# EAGLE board flatsat_v2 (EAGLE 9.5.2)
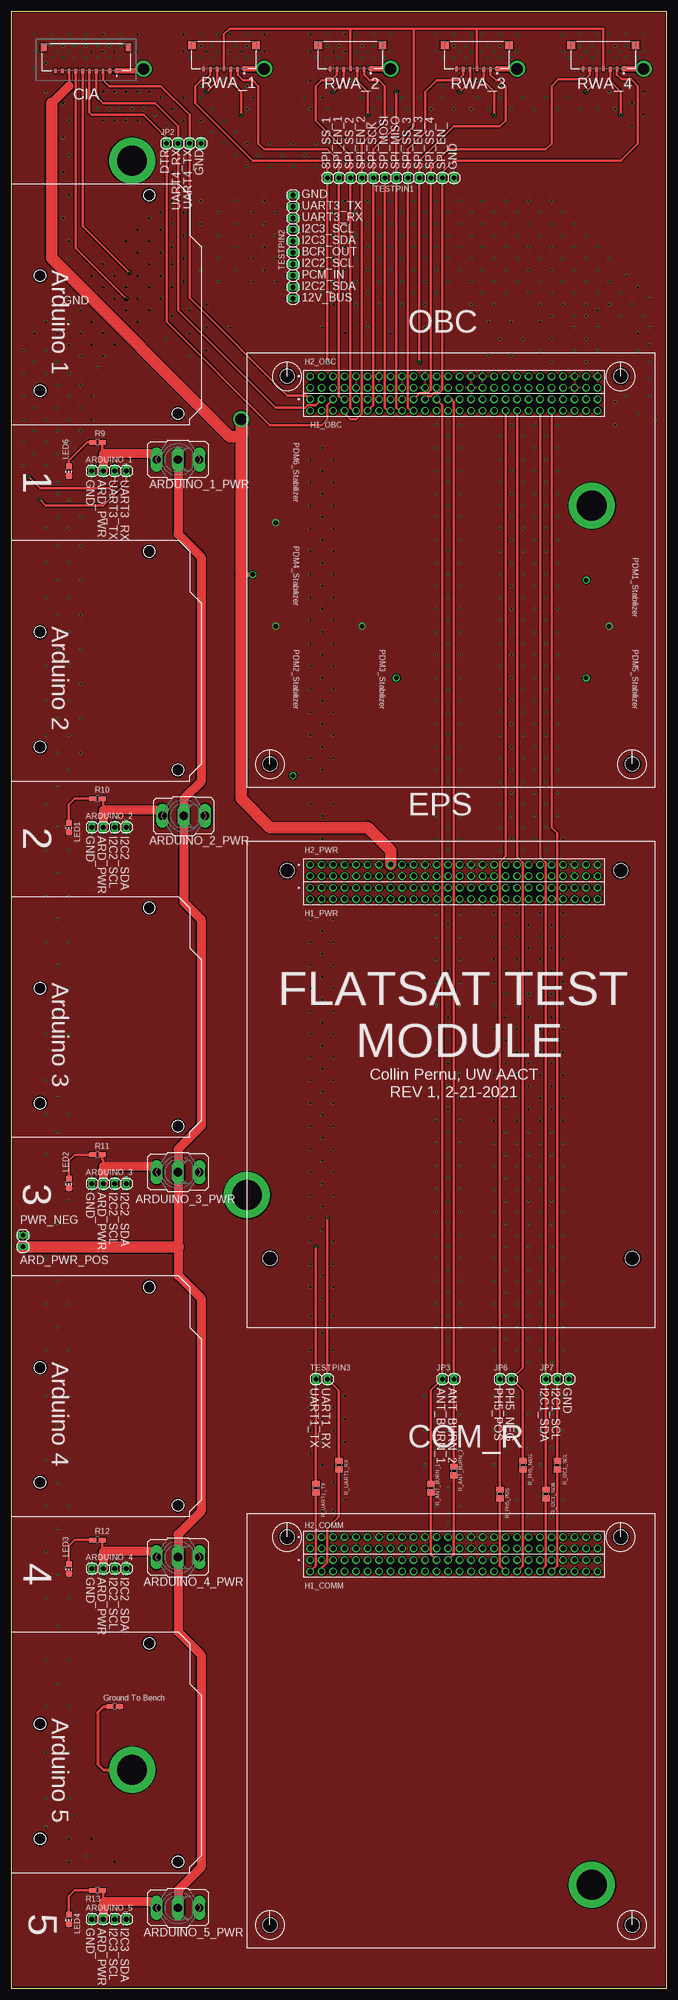
[diagram p0: board, top side]
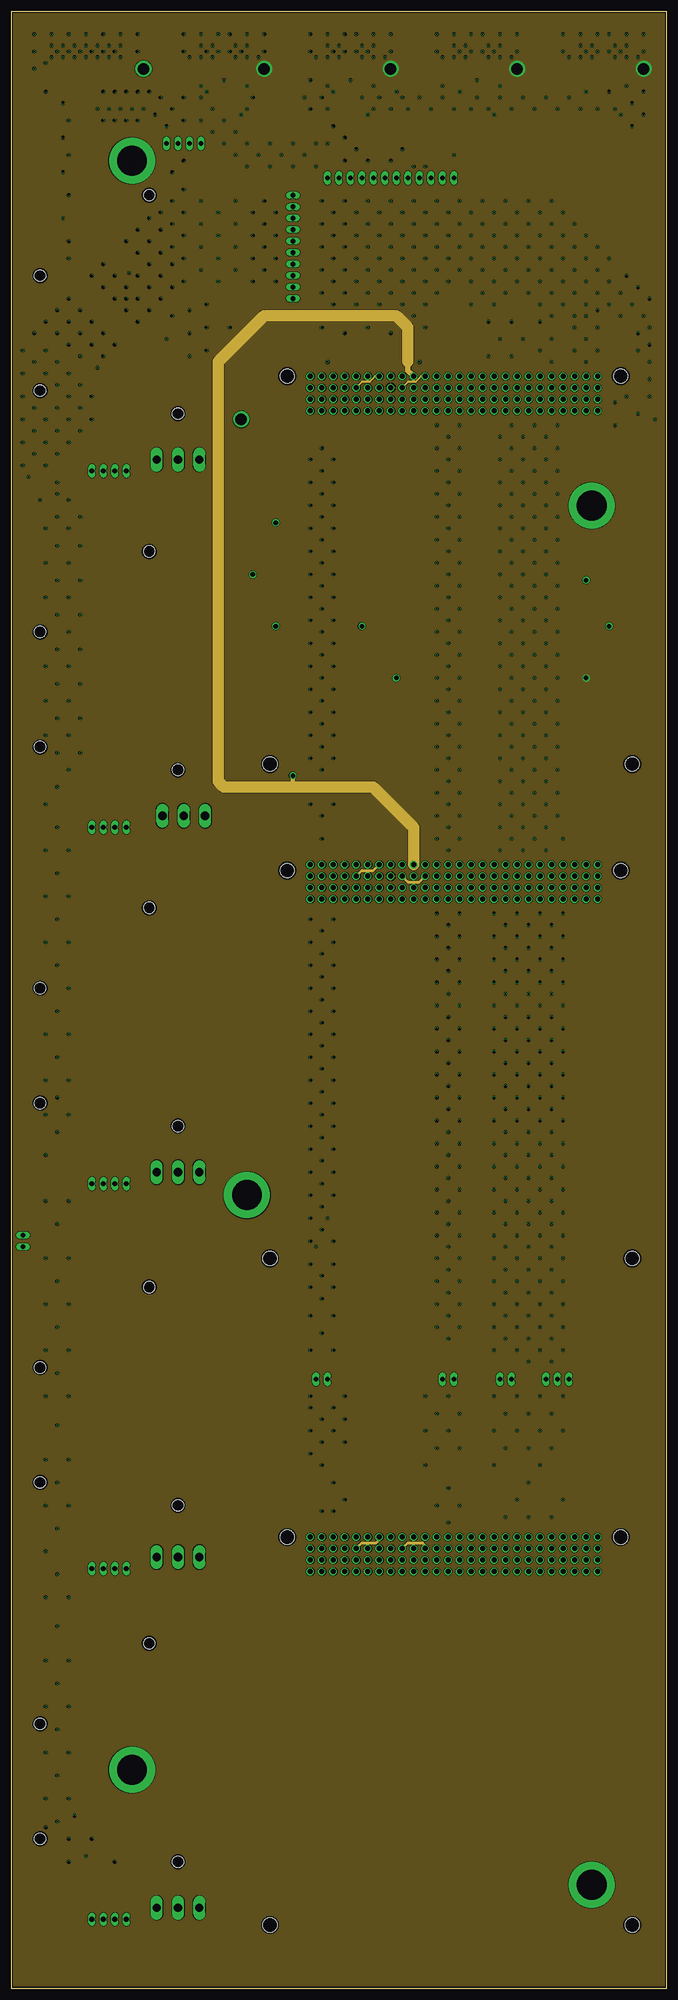
[diagram p1: board, inner layer Route2]
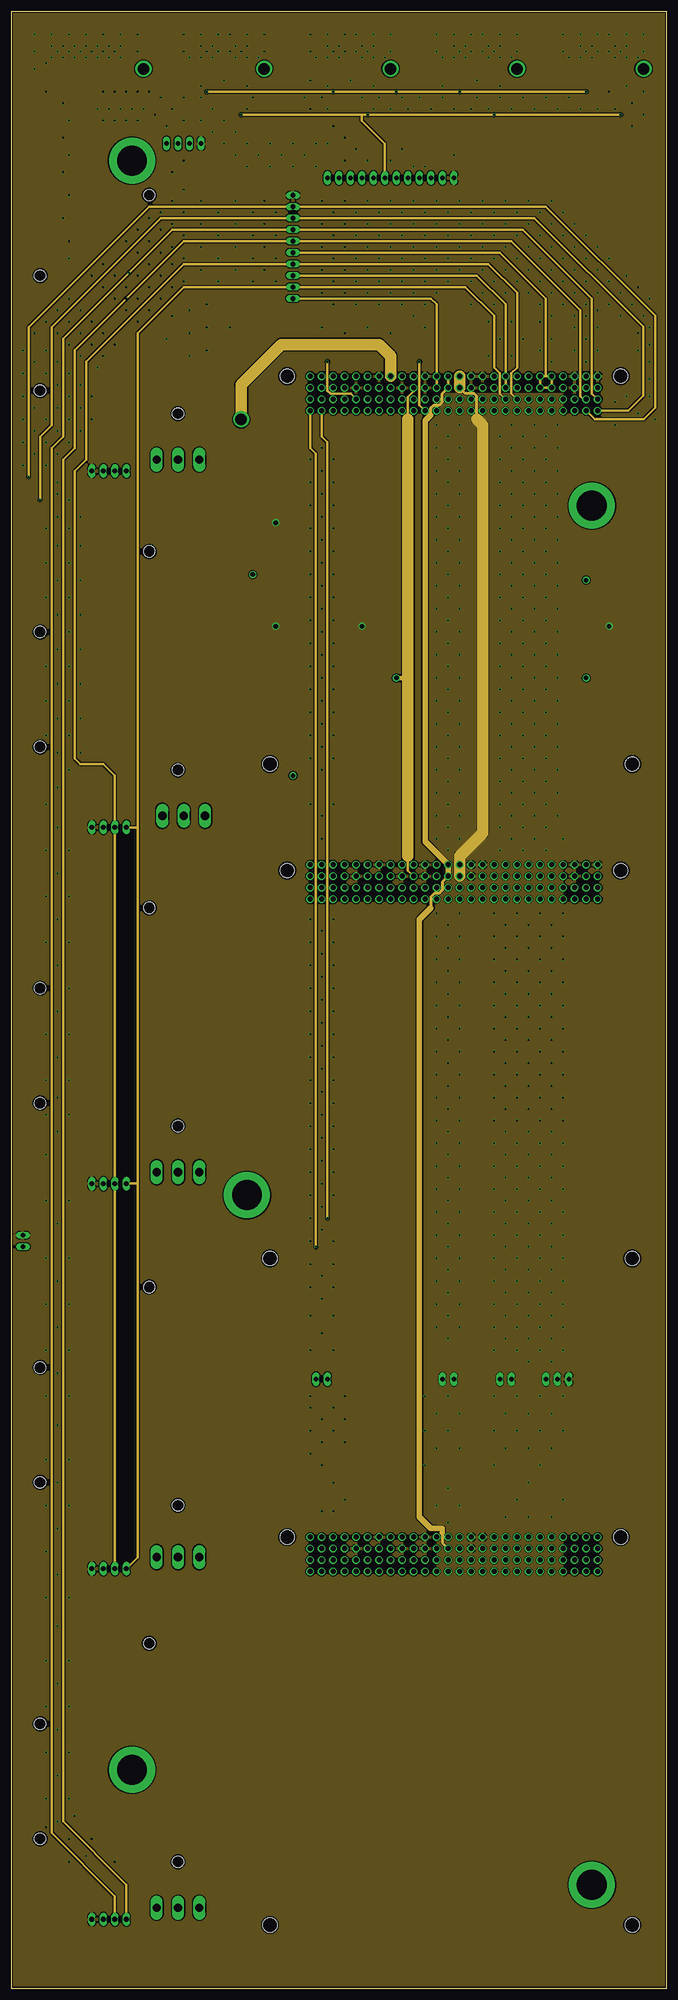
[diagram p2: board, inner layer Route15]
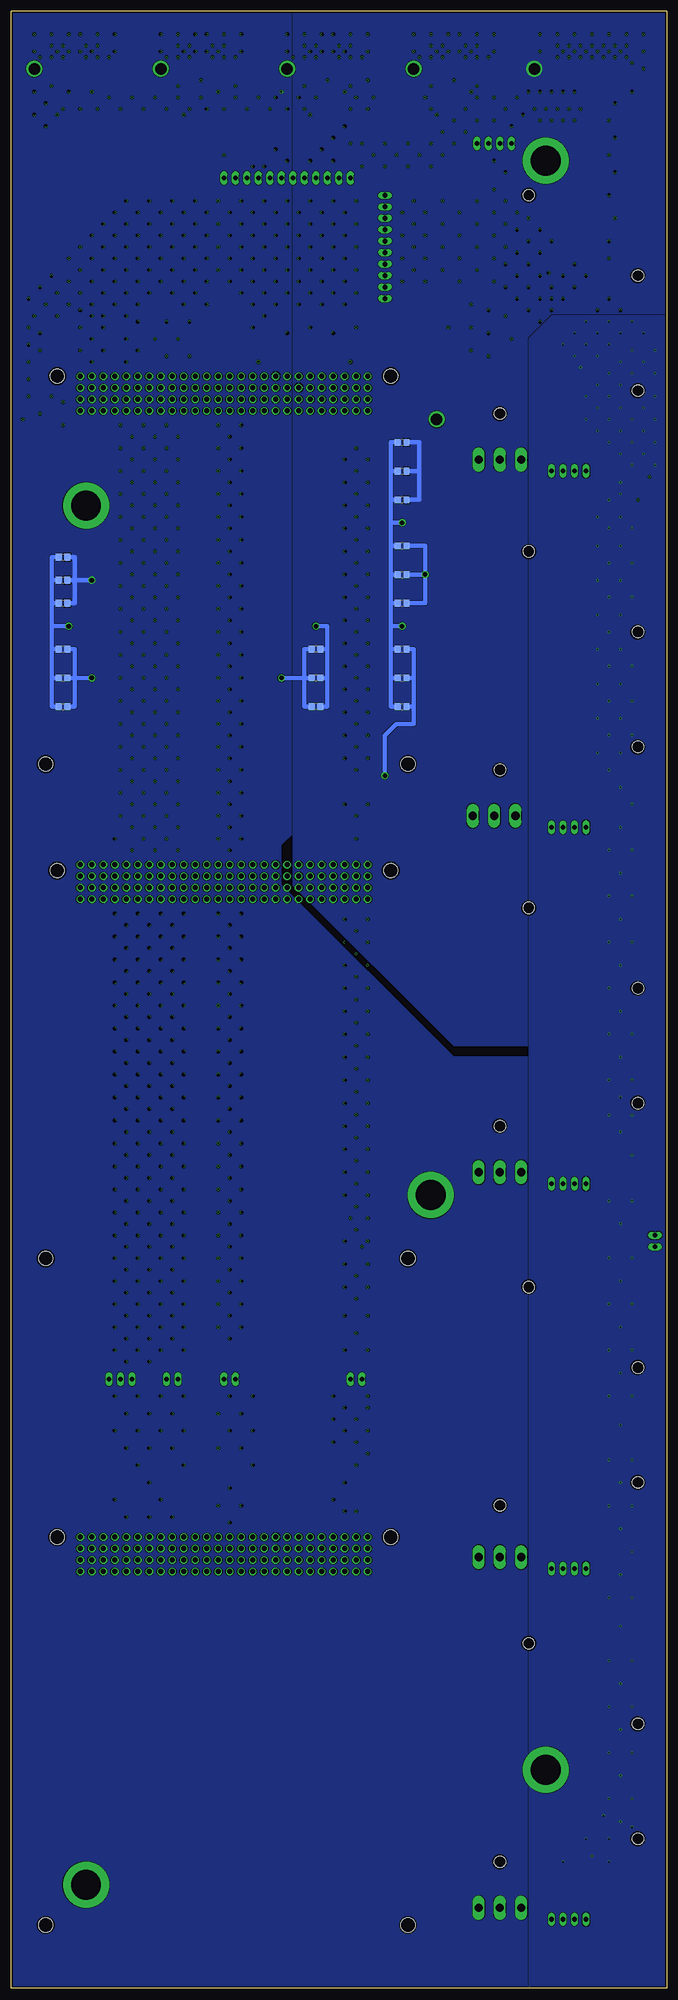
[diagram p3: board, bottom side, seen from below]

Size 144.78 x 436.88 mm. Coordinates in mm from the lower left corner, seen from the top.
Outline: 0,0 144.78,0 144.78,436.88 0,436.88 0,0
Copper layers (1*2*15*16): Top 0.035559375mm / dielectric 0.17018125mm / Route2 0.01778125mm / dielectric 47mil / Route15 0.01778125mm / dielectric 0.17018125mm / Bottom 0.035559375mm
Design rules "oshpark-4layer": minimum track width 5mil, minimum drill 10mil, track to track 5mil, track to pad 5mil, pad to pad 5mil, via to via 5mil, smd to smd 5mil, copper to edge 15mil, drill to drill 6mil, minimum pad ring 4mil, minimum via ring 4mil, stop-mask expansion 1.5mil, vias tented up to drill 0mil, thermal gap 10mil
Net classes: 0 default: width 0.305 mm; 1 Power Line: width 0.356 mm; 2 Signal Line: width 0.254 mm
Holes 3.17 mm at 134.62,356.24 60.96,356.24 137.16,270.51 57.15,270.51 60.96,99.69 134.62,99.69 137.16,13.97 57.15,13.97 60.96,247.01 134.62,247.01 137.16,161.29 57.15,161.29
Holes 2.54 mm at 30.48,238.76 36.83,269.24 6.35,274.32 30.48,317.5 36.83,347.98 6.35,353.06 30.48,396.24 6.35,195.58 36.83,190.5 30.48,154.94 6.35,111.76 36.83,106.68 30.48,76.2 36.83,27.94 6.35,33.02 6.35,58.42 6.35,137.16 6.35,220.98 6.35,299.72 6.35,378.46

## Footprints (pad centres in the part's own frame; a part is rotated, then mirrored left to right if it is on the bottom)
1X02 = drill 1.016 long: 1 -1.27,0; 2 1.27,0
1X04 = drill 1.016 long: 1 -3.81,0; 2 -1.27,0; 3 1.27,0; 4 3.81,0
M9040P = drill 1.803 long: 1 0,4.699; 2 0,0; 3 0,-4.699
C0805 = smd 1.3 x 1.5: 1 -0.95,0; 2 0.95,0
5040501091 = smd 0.6 x 1: 1 6.75,-2.975; 2 5.25,-2.975; 3 3.75,-2.975; 4 2.25,-2.975; 5 0.75,-2.975; 6 -0.75,-2.975; 7 -2.25,-2.975; 8 -3.75,-2.975; 9 -5.25,-2.975; 10 -6.75,-2.975 | smd 1.25 x 1.8: MP1 -9.355,2.215; MP2 9.355,2.215
ESQ-126-39-G-D_SAMTEC_ESQ-126-39-G-D = drill 1.1: 1 0,0; 2 0,-2.54; 3 2.54,0; 4 2.54,-2.54; 5 5.08,0; 6 5.08,-2.54; 7 7.62,0; 8 7.62,-2.54; 9 10.16,0; 10 10.16,-2.54; 11 12.7,0; 12 12.7,-2.54; 13 15.24,0; 14 15.24,-2.54; 15 17.78,0; 16 17.78,-2.54; 17 20.32,0; 18 20.32,-2.54; 19 22.86,0; 20 22.86,-2.54; 21 25.4,0; 22 25.4,-2.54; 23 27.94,0; 24 27.94,-2.54; 25 30.48,0; 26 30.48,-2.54; 27 33.02,0; 28 33.02,-2.54; 29 35.56,0; 30 35.56,-2.54; 31 38.1,0; 32 38.1,-2.54; 33 40.64,0; 34 40.64,-2.54; 35 43.18,0; 36 43.18,-2.54; 37 45.72,0; 38 45.72,-2.54; 39 48.26,0; 40 48.26,-2.54; 41 50.8,0; 42 50.8,-2.54; 43 53.34,0; 44 53.34,-2.54; 45 55.88,0; 46 55.88,-2.54; 47 58.42,0; 48 58.42,-2.54; 49 60.96,0; 50 60.96,-2.54; 51 63.5,0; 52 63.5,-2.54
1X03 = drill 1.016 long: 1 -2.54,0; 2 0,0; 3 2.54,0
CHIP-LED0805 = smd 1.2 x 1.2: A 0,-1.05; C 0,1.05
R0805W = smd 1.5 x 1: 1 -1.052,0; 2 1.052,0
M0805 = smd 1.3 x 1.6: 1 -0.95,0; 2 0.95,0
504050-0791 = smd 0.6 x 1: 1 4.5,0; 2 3,0; 3 1.5,0; 4 0,0; 5 -1.5,0; 6 -3,0; 7 -4.5,0 | smd 1.68 x 1.8: 8 -7.105,5.19; 9 7.105,5.19
BENCH_MOUNING_HOLE = drill 6.604 pad 10.16: P$1 0,0
1X12 = drill 1.016 long: 1 -13.97,0; 2 -11.43,0; 3 -8.89,0; 4 -6.35,0; 5 -3.81,0; 6 -1.27,0; 7 1.27,0; 8 3.81,0; 9 6.35,0; 10 8.89,0; 11 11.43,0; 12 13.97,0
1X10 = drill 1.016 long: 1 -11.43,0; 2 -8.89,0; 3 -6.35,0; 4 -3.81,0; 5 -1.27,0; 6 1.27,0; 7 3.81,0; 8 6.35,0; 9 8.89,0; 10 11.43,0

## Placement (x,y rotation side)
ADDUINO_PWR  [1X02]  2.54,165.1 90 top
ARDUINO_1  [1X04]  21.59,335.28 0 top
ARDUINO_1_PWR  [M9040P]  36.83,337.82 90 top
ARDUINO_2  [1X04]  21.59,256.54 0 top
ARDUINO_2_PWR  [M9040P]  38.1,259.08 90 top
ARDUINO_3  [1X04]  21.59,177.8 0 top
ARDUINO_3_PWR  [M9040P]  36.83,180.34 90 top
ARDUINO_4  [1X04]  21.59,92.71 0 top
ARDUINO_4_PWR  [M9040P]  36.83,95.25 90 top
ARDUINO_5  [1X04]  21.59,15.24 0 top
ARDUINO_5_PWR  [M9040P]  36.83,17.78 90 top
C1  47uF  [C0805]  133.35,316.23 0 bottom
C2  1uF  [C0805]  133.35,311.15 0 bottom
C3  0.1uF  [C0805]  133.35,306.07 0 bottom
C4  47uF  [C0805]  58.42,289.56 0 bottom
C5  1uF  [C0805]  58.42,283.21 0 bottom
C6  0.1uF  [C0805]  58.42,295.91 0 bottom
C7  47uF  [C0805]  77.47,289.56 180 bottom
C8  1uF  [C0805]  77.47,283.21 180 bottom
C9  0.1uF  [C0805]  77.47,295.91 180 bottom
C10  47uF  [C0805]  58.42,312.42 0 bottom
C11  1uF  [C0805]  58.42,306.07 0 bottom
C12  0.1uF  [C0805]  58.42,318.77 0 bottom
C13  47uF  [C0805]  133.35,289.56 0 bottom
C14  1uF  [C0805]  133.35,283.21 0 bottom
C15  0.1uF  [C0805]  133.35,295.91 0 bottom
C16  47uF  [C0805]  58.42,335.28 0 bottom
C17  1uF  [C0805]  58.42,328.93 0 bottom
C18  0.1uF  [C0805]  58.42,341.63 0 bottom
CIA  5040501091  [5040501091]  16.51,426.72 0 top
H1_COMM  ESQ-126-39-G-D_ESQ-126-39-G-D  [ESQ-126-39-G-D_SAMTEC_ESQ-126-39-G-D]  66.04,94.61 0 top
H1_OBC  ESQ-126-39-G-D_ESQ-126-39-G-D  [ESQ-126-39-G-D_SAMTEC_ESQ-126-39-G-D]  66.04,351.15 0 top
H1_PWR  ESQ-126-39-G-D_ESQ-126-39-G-D  [ESQ-126-39-G-D_SAMTEC_ESQ-126-39-G-D]  66.04,243.21 0 top
H2_COMM  ESQ-126-39-G-D_ESQ-126-39-G-D  [ESQ-126-39-G-D_SAMTEC_ESQ-126-39-G-D]  66.04,99.69 0 top
H2_OBC  ESQ-126-39-G-D_ESQ-126-39-G-D  [ESQ-126-39-G-D_SAMTEC_ESQ-126-39-G-D]  66.04,356.24 0 top
H2_PWR  ESQ-126-39-G-D_ESQ-126-39-G-D  [ESQ-126-39-G-D_SAMTEC_ESQ-126-39-G-D]  66.04,248.28 0 top
JP2  [1X04]  38.1,407.67 0 top
JP3  [1X02]  96.52,134.62 0 top
JP6  [1X02]  109.22,134.62 0 top
JP7  [1X03]  120.65,134.62 0 top
LED1  [CHIP-LED0805]  12.7,256.54 180 top
LED2  [CHIP-LED0805]  12.7,177.8 180 top
LED3  [CHIP-LED0805]  12.7,92.71 180 top
LED4  [CHIP-LED0805]  12.7,15.24 180 top
LED6  [CHIP-LED0805]  12.7,335.28 180 top
R9  0  [R0805W]  19.05,341.63 180 top
R10  0  [R0805W]  19.05,262.89 180 top
R11  0  [R0805W]  19.05,184.15 180 top
R12  0  [R0805W]  19.05,99.06 180 top
R13  0  [R0805W]  19.05,21.59 180 top
R14  0 ohm  [R0805W]  22.86,62.23 180 top
R_ANT_BURN_1  0 ohm  [M0805]  92.71,110.49 90 top
R_ANT_BURN_2  0 ohm  [M0805]  97.79,114.3 90 top
R_I2C1_SCL  0 ohm  [M0805]  120.65,115.57 270 top
R_I2C1_SDA  0 ohm  [M0805]  118.11,109.22 270 top
R_PH5_NEG  0 ohm  [M0805]  113.03,115.57 270 top
R_PH5_POS  0 ohm  [M0805]  107.95,109.22 270 top
R_UART1_RX  0 ohm  [M0805]  72.39,115.57 270 top
R_UART1_TX  0 ohm  [M0805]  67.31,110.49 270 top
RWA_1  504050-0791  [504050-0791]  46.99,424.18 0 top
RWA_2  504050-0791  [504050-0791]  74.93,424.18 0 top
RWA_3  504050-0791  [504050-0791]  102.87,424.18 0 top
RWA_4  504050-0791  [504050-0791]  130.81,424.18 0 top
TESTBENCH_1  BENCH_MOUNTING_HOLE  [BENCH_MOUNING_HOLE]  26.67,48.26 0 top
TESTBENCH_2  BENCH_MOUNTING_HOLE  [BENCH_MOUNING_HOLE]  26.67,403.86 0 top
TESTBENCH_3  BENCH_MOUNTING_HOLE  [BENCH_MOUNING_HOLE]  52.07,175.26 0 top
TESTBENCH_4  BENCH_MOUNTING_HOLE  [BENCH_MOUNING_HOLE]  128.27,327.66 0 top
TESTBENCH_5  BENCH_MOUNTING_HOLE  [BENCH_MOUNING_HOLE]  128.27,22.86 0 top
TESTPIN1  [1X12]  83.82,400.05 0 top
TESTPIN2  [1X10]  62.23,384.81 90 top
TESTPIN3  [1X02]  68.58,134.62 0 top

## Library data of the parts
ADDUINO_PWR ARDUINO_1-ARDUINO_5 JP2 JP3 JP6 JP7 TESTPIN1-TESTPIN3 = pinhead
ARDUINO_1_PWR ARDUINO_2_PWR ARDUINO_3_PWR ARDUINO_4_PWR ARDUINO_5_PWR = switch
C1-C18 = rcl; SPICEPREFIX: C
CIA = 5040501091; ARROW_PART_NUMBER: 5040501091; ARROW_PRICE-STOCK: https://www.arrow.com/en/products/5040501091/molex; DESCRIPTION: 1.50mm Pitch, Pico-Lock PCB Header, Dual Row, Right-Angle, Surface Mount, Gold over Nickel Plating, Positive Lock, Circuits; HEIGHT: 2.15mm; MANUFACTURER_NAME: Molex; MANUFACTURER_PART_NUMBER: 5040501091
H1_COMM H1_OBC H1_PWR H2_COMM H2_OBC H2_PWR = EPS Flatsat Module2; DESCRIPTION: 52 Position Elevated Socket Connector Through Hole; DIGI-KEY_PART_NUMBER: SAM10462-ND; DIGI-KEY_PURCHASE_URL: https://www.digikey.com/product-detail/en/samtec-inc/ESQ-126-39-G-D/SAM10462-ND/3601055?utm_source=snapeda&utm_medium=aggregator&utm_campaign=symbol; MF: Samtec; MP: ESQ-126-39-G-D; PACKAGE: None
LED1-LED4 LED6 = led
R9-R14 R_ANT_BURN_1 R_ANT_BURN_2 R_I2C1_SCL R_I2C1_SDA R_PH5_NEG R_PH5_POS R_UART1_RX R_UART1_TX = rcl; SPICEPREFIX: R
RWA_1-RWA_4 = 504050-0791; DESCRIPTION: Molex 504050 Series, 1.5mm Pitch 7 Way 1 Row Right Angle PCB Header, SMT Termination, 3A; HEIGHT: mm; MANUFACTURER_NAME: Molex; MANUFACTURER_PART_NUMBER: 504050-0791; MOUSER_PART_NUMBER: 538-504050-0791; MOUSER_PRICE-STOCK: https://www.mouser.co.uk/ProductDetail/Molex/504050-0791/?qs=bvCPb%252BE7ys0LP7A0OZeD8A%3D%3D
TESTBENCH_1-TESTBENCH_5 = test-library

## Nets
3V3_BUS [Power Line]: H2_OBC.27 H2_OBC.28 H2_PWR.27 H2_PWR.28
3V3_PDM1 [Power Line]: C1.2 C2.2 C3.2 H2_COMM.17 H2_OBC.17 H2_PWR.17
3V3_PDM2 [Power Line]: C4.2 C5.2 C6.2 H2_OBC.19 H2_PWR.19
3V3_PDM3 [Power Line]: C7.2 C8.2 C9.2 H2_OBC.20 H2_PWR.20
5V_BUS [Power Line]: H2_COMM.26 H2_OBC.25 H2_OBC.26 H2_PWR.25 H2_PWR.26
5V_PDM4 [Power Line]: C10.2 C11.2 C12.2 CIA.8 H2_OBC.15 H2_PWR.15
5V_PDM5 [Power Line]: C13.2 C14.2 C15.2 H2_OBC.16 H2_PWR.16 RWA_1.1 RWA_2.1 RWA_3.1 RWA_4.1
5V_PDM6 [Signal Line]: C16.2 C17.2 C18.2 CIA.1 H2_OBC.14 H2_PWR.14
5V_USB [Power Line]: H2_OBC.52
12V_BUS [Power Line]: H2_OBC.23 H2_OBC.24 TESTPIN2.1
ANT_BURN_WIRE_1: H1_OBC.23 JP3.1 R_ANT_BURN_1.2
ANT_BURN_WIRE_2: H1_OBC.25 JP3.2 R_ANT_BURN_2.2
ARDUINO_1_PWR: ARDUINO_1.2 ARDUINO_1_PWR.1 R9.1
ARDUINO_2_PWR [Signal Line]: ARDUINO_2.2 ARDUINO_2_PWR.1 R10.1
ARDUINO_3_PWR [Signal Line]: ARDUINO_3.2 ARDUINO_3_PWR.1 R11.1
ARDUINO_4_PWR [Signal Line]: ARDUINO_4.2 ARDUINO_4_PWR.1 R12.1
ARDUINO_5_PWR [Signal Line]: ARDUINO_5.2 ARDUINO_5_PWR.1 R13.1
ARUINO_MAIN_PWR [Power Line]: ADDUINO_PWR.1 ARDUINO_1_PWR.2 ARDUINO_2_PWR.2 ARDUINO_3_PWR.2 ARDUINO_4_PWR.2 ARDUINO_5_PWR.2
BCR_OUT: H2_OBC.41 H2_OBC.42 H2_OBC.43 H2_OBC.44 TESTPIN2.5
CHASSIS [Power Line]: H2_OBC.49
DTR: CIA.5 H1_OBC.5 JP2.1
GND [Power Line]: ADDUINO_PWR.2 ARDUINO_1.1 ARDUINO_2.1 ARDUINO_3.1 ARDUINO_4.1 ARDUINO_5.1 C1.1 C2.1 C3.1 C4.1 C5.1 C6.1 C7.1 C8.1 C9.1 C10.1 C11.1 C12.1 C13.1 C14.1 C15.1 C16.1 C17.1 C18.1 CIA.2 H2_COMM.10 H2_COMM.13 H2_COMM.18 H2_COMM.21 H2_COMM.22 H2_COMM.29 H2_COMM.30 H2_COMM.31 H2_OBC.10 H2_OBC.13 H2_OBC.18 H2_OBC.21 H2_OBC.22 H2_OBC.29 H2_OBC.30 H2_OBC.31 H2_OBC.47 H2_OBC.48 H2_OBC.51 H2_PWR.10 H2_PWR.13 H2_PWR.18 H2_PWR.21 H2_PWR.22 H2_PWR.29 H2_PWR.30 H2_PWR.31 H2_PWR.47 H2_PWR.48 H2_PWR.51 JP2.4 JP7.3 LED1.C LED2.C LED3.C LED4.C LED6.C R14.1 RWA_1.7 RWA_2.7 RWA_3.7 RWA_4.7 TESTPIN1.12 TESTPIN2.10
I2C1_SCL [Signal Line]: H1_OBC.44 H1_PWR.44 JP7.2 R_I2C1_SCL.1
I2C1_SDA [Signal Line]: H1_OBC.42 H1_PWR.42 JP7.1 R_I2C1_SDA.1
I2C2_SCL [Signal Line]: ARDUINO_2.3 ARDUINO_3.3 ARDUINO_4.3 H1_OBC.37 TESTPIN2.4
I2C2_SDA [Signal Line]: ARDUINO_2.4 ARDUINO_3.4 ARDUINO_4.4 H1_OBC.35 TESTPIN2.2
I2C3_SCL [Signal Line]: ARDUINO_5.3 CIA.6 H1_OBC.51 TESTPIN2.7
I2C3_SDA [Signal Line]: ARDUINO_5.4 CIA.7 H1_OBC.49 TESTPIN2.6
N$1: H1_COMM.4 R_UART1_RX.2
N$2: LED4.A R13.2
N$3: H1_COMM.2 R_UART1_TX.2
N$4: H1_COMM.36 R_PH5_POS.2
N$5: H1_COMM.38 R_PH5_NEG.2
N$6: H1_COMM.23 R_ANT_BURN_1.1
N$7: H1_COMM.25 R_ANT_BURN_2.1
N$8: H1_COMM.42 R_I2C1_SDA.2
N$9: H1_COMM.44 R_I2C1_SCL.2
N$10: LED3.A R12.2
N$11: CIA.9
N$12: CIA.10
N$13: LED2.A R11.2
N$14: LED1.A R10.2
N$15: LED6.A R9.2
N$16: R14.2 TESTBENCH_1.P$1
PCM_IN: H2_OBC.35 H2_OBC.36 TESTPIN2.3
PH5_NEG: H1_OBC.38 JP6.2 R_PH5_NEG.1
PH5_POS: H1_OBC.36 JP6.1 R_PH5_POS.1
SPI_EN_1 [Signal Line]: H1_OBC.7 RWA_1.2 TESTPIN1.2
SPI_EN_2 [Signal Line]: H1_OBC.8 RWA_2.2 TESTPIN1.4
SPI_EN_3 [Signal Line]: H1_OBC.22 RWA_3.2 TESTPIN1.9
SPI_EN_4 [Signal Line]: H1_OBC.21 RWA_4.2 TESTPIN1.11
SPI_MISO: H1_OBC.18 RWA_1.4 RWA_2.4 RWA_3.4 RWA_4.4 TESTPIN1.7
SPI_MOSI [Signal Line]: H1_OBC.16 RWA_1.3 RWA_2.3 RWA_3.3 RWA_4.3 TESTPIN1.6
SPI_SCK [Signal Line]: H1_OBC.12 RWA_1.5 RWA_2.5 RWA_3.5 RWA_4.5 TESTPIN1.5
SPI_SS_1 [Signal Line]: H1_OBC.9 RWA_1.6 TESTPIN1.1
SPI_SS_2 [Signal Line]: H1_OBC.10 RWA_2.6 TESTPIN1.3
SPI_SS_3 [Signal Line]: H1_OBC.20 RWA_3.6 TESTPIN1.8
SPI_SS_4 [Signal Line]: H1_OBC.19 RWA_4.6 TESTPIN1.10
UART1_RX: H1_OBC.4 R_UART1_RX.1 TESTPIN3.2
UART1_TX: H1_OBC.2 R_UART1_TX.1 TESTPIN3.1
UART3_RX: ARDUINO_1.4 H1_OBC.52 TESTPIN2.8
UART3_TX [Signal Line]: ARDUINO_1.3 H1_OBC.50 TESTPIN2.9
UART4_RX: CIA.4 H1_OBC.3 JP2.2
UART4_TX: CIA.3 H1_OBC.1 JP2.3

## Tracks (layer width: path | path; a pad name or v marks a point on that pad's centre or on a via)
3V3_BUS
  Route15 0.635: 102.87,346.71 102.87,351.79 102.23,352.43 100.33,352.43 H2_OBC.28
  Route15 2.54: H2_PWR.28 H2_PWR.27 99.06,250.19 104.14,255.27 104.14,345.44 102.87,346.71 | H2_OBC.27 H2_OBC.28
3V3_PDM1  (via drill 1.02)
  Bottom 1.016: C1.2 130.81,316.23 130.81,311.15 | 130.81,311.15 130.81,306.07 C3.2 | C2.2 130.81,311.15 | 130.81,311.15 v127,311.15
  pour Bottom (rank 3): 85.09,243.84 85.09,252.73 82.42,255.4 82.42,439.42 147.32,439.42 147.32,-2.54 -2.54,-2.54 -2.54,205.74 46.99,205.74
3V3_PDM2  (via drill 1.02)
  Route2 1.016: 62.23,265.43 v62.23,267.97
  Route2 1.27: H2_OBC.19 87.63,357.5 87.63,359.41
  Route2 2.54: H2_PWR.19 88.9,256.54 80.01,265.43 62.23,265.43 46.99,265.43 45.72,266.7 45.72,359.41 55.88,369.57 85.09,369.57 87.63,367.03 87.63,359.41
  Bottom 1.016: v62.23,267.97 62.23,276.86 59.69,279.4 55.88,279.4 55.88,283.21 | 55.88,283.21 55.88,289.56 | 55.88,289.56 55.88,295.91 C6.2 | C4.2 55.88,289.56 | C5.2 55.88,283.21
3V3_PDM3  (via drill 1.02)
  Route15 0.508: H2_OBC.20 88.9,352.9 87.63,351.63 87.63,346.71 | H2_PWR.20 87.63,247.01 87.63,250.19
  Route15 1.016: v85.09,289.56 87.63,289.56
  Route15 2.54: 87.63,346.71 87.63,289.56 87.63,250.19
  Bottom 1.016: C9.2 80.01,295.91 80.01,289.56 | 80.01,289.56 80.01,283.21 C8.2 | 80.01,289.56 C7.2 | 80.01,289.56 v85.09,289.56
5V_BUS
  Route15 0.508: H2_OBC.25 H2_OBC.26
  Route15 0.635: 92.71,347.64 | 92.71,347.64 92.71,349.14 93.45,349.88 93.98,349.88 94.51,349.88 95.25,350.63 95.25,352.43 H2_OBC.26 | H2_PWR.26 95.25,244.47 95.25,242.68 94.51,241.94 93.45,241.94 92.71,241.19 92.71,238.76 | 95.25,100.67 95.25,98.42 H2_COMM.26
  Route15 1.27: H2_PWR.26 H2_PWR.25 91.44,253.37 91.44,346.37 92.71,347.64 | 92.71,238.76 90.17,236.22 90.17,104.14 92.71,101.6 95.25,101.6 95.25,100.67
5V_PDM4  (via drill 1.02, 2.54)
  Top 0.508: 12.76,420.43 CIA.8
  Top 1.016: 50.8,312.42 v53.34,312.42
  Top 2.032: 8.89,416.56 12.76,420.43
  Top 2.54: H2_PWR.15 83.82,251.46 78.74,256.54 57.15,256.54 50.8,262.89 50.8,312.42 50.8,342.9 | 50.8,342.9 48.26,342.9 8.89,382.27 8.89,416.56 | 50.8,342.9 v50.8,346.71
  Route15 2.54: H2_OBC.15 83.82,360.68 81.28,363.22 59.69,363.22 50.8,354.33 v50.8,346.71
  Bottom 1.016: C11.2 53.34,306.07 v53.34,312.42 | v53.34,312.42 53.34,318.77 C12.2 | v53.34,312.42 C10.2
5V_PDM5  (via drill 1.02, 2.54)
  Top 1.27: RWA_1.1 v55.88,424.18 | RWA_2.1 v83.82,424.18 | RWA_3.1 v111.76,424.18 | RWA_4.1 v139.7,424.18
  Bottom 1.016: C15.2 130.81,295.91 130.81,289.56 | 130.81,289.56 130.81,283.21 C14.2 | C13.2 130.81,289.56 | 130.81,289.56 v127,289.56
  pour Route2 (rank 2): -1.27,438.15 146.05,438.15 146.05,-1.27 -1.27,-1.27
5V_PDM6  (via drill 2.54)
  Top 0.508: 29.21,423.75 v29.21,424.18
  Top 1.27: CIA.1 29.21,423.75
  Bottom 1.016: C18.2 54.61,341.63 54.61,335.28 | 54.61,335.28 54.61,328.93 C17.2 | C16.2 54.61,335.28
  pour Bottom (rank 2): 82.55,243.84 46.99,208.28 -2.54,208.28 -2.54,439.42 82.55,439.42
12V_BUS
  Route15 0.508: H2_OBC.24 H2_OBC.23 93.98,372.11 92.71,373.38 TESTPIN2.1
ANT_BURN_WIRE_1
  Top 0.508: H1_OBC.23 95.25,349.88 JP3.1 92.71,132.08 R_ANT_BURN_1.2
ANT_BURN_WIRE_2
  Top 0.508: H1_OBC.25 97.16,351.15 97.79,350.52 JP3.2 R_ANT_BURN_2.2
ARDUINO_1_PWR
  Top 0.508: 20.32,339.09 20.1,339.31 R9.1
  Top 2.032: ARDUINO_1_PWR.1 30.86,339.09 20.32,339.09 ARDUINO_1.2
ARDUINO_2_PWR
  Top 0.508: 20.32,260.35 20.32,262.89 R10.1
  Top 2.032: ARDUINO_2_PWR.1 32.13,260.35 20.32,260.35 ARDUINO_2.2
ARDUINO_3_PWR
  Top 0.508: 20.32,181.61 20.32,182.88 20.1,183.1 R11.1
  Top 2.032: ARDUINO_3_PWR.1 30.86,181.61 20.32,181.61 ARDUINO_3.2
ARDUINO_4_PWR
  Top 0.508: 20.32,95.25 20.1,95.25 R12.1
  Top 2.032: ARDUINO_4_PWR.1 30.86,96.52 20.32,96.52 20.32,95.25 ARDUINO_4.2
ARDUINO_5_PWR
  Top 0.508: R13.1 20.32,21.37 20.32,19.05
  Top 2.032: ARDUINO_5.2 20.32,19.05 30.86,19.05 ARDUINO_5_PWR.1
ARUINO_MAIN_PWR
  Top 2.032: ARDUINO_1_PWR.2 36.83,321.31 41.91,316.23 41.91,266.7 38.1,262.89 ARDUINO_2_PWR.2 38.1,240.03 41.91,236.22 41.91,190.5 36.83,185.42 ARDUINO_3_PWR.2 36.83,163.83 36.83,157.48 41.91,152.4 41.91,105.41 36.83,100.33 ARDUINO_4_PWR.2 36.83,78.74 41.91,73.66 41.91,26.67 36.83,21.59 ARDUINO_5_PWR.2
  Top 2.54: ADDUINO_PWR.1 36.83,163.83
BCR_OUT
  Route15 0.508: 118.11,356.24 H2_OBC.43 H2_OBC.44 H2_OBC.42 H2_OBC.41 118.11,356.24 | 118.11,356.24 118.11,373.38 107.95,383.54 TESTPIN2.5
DTR
  Top 0.508: H1_OBC.5 69.85,349.88 69.85,346.71 68.58,345.44 57.15,345.44 34.29,368.3 JP2.1 34.29,408.94 29.21,414.02 17.78,414.02 17.26,414.54 CIA.5
GND  (via drill 0.35, 1.02)
  Route2 0.508: H2_OBC.18 87.69,355.03 89.4,355.03 90.61,356.24 H2_OBC.21 | H2_OBC.10 77.53,355.03 79.24,355.03 80.45,356.24 H2_OBC.13
  Route2 0.635: H2_COMM.18 87.63,98.42 90.81,98.42 91.44,97.79 H2_COMM.22 | H2_PWR.18 87.63,244.47 90.17,244.47 H2_PWR.22 | H2_PWR.10 77.47,247.01 80.01,247.01 H2_PWR.13 | H2_COMM.10 77.47,98.42 80.64,98.42 81.28,99.06 H2_COMM.13
  Bottom 1.016: C18.1 60.96,341.63 60.96,335.28 | 60.96,335.28 60.96,328.93 | 60.96,328.93 60.96,323.85 | 60.96,323.85 60.96,318.77 | 60.96,318.77 60.96,312.42 | 60.96,312.42 60.96,306.07 | 60.96,306.07 60.96,300.99 | 60.96,300.99 60.96,295.91 | 60.96,295.91 60.96,289.56 | 60.96,289.56 60.96,283.21 C5.1 | C4.1 60.96,289.56 | C11.1 60.96,306.07 | C10.1 60.96,312.42 | C12.1 60.96,318.77 | 60.96,323.85 v58.42,323.85 | 60.96,300.99 v58.42,300.99 | C8.1 74.93,283.21 74.93,289.56 | 74.93,289.56 74.93,295.91 | 74.93,295.91 C9.1 | C7.1 74.93,289.56 | 74.93,295.91 74.93,300.99 v77.47,300.99 | C1.1 135.89,316.23 135.89,311.15 | 135.89,311.15 135.89,306.07 | 135.89,306.07 135.89,300.99 | 135.89,300.99 135.89,295.91 | 135.89,295.91 135.89,289.56 | 135.89,289.56 135.89,283.21 C14.1 | 135.89,289.56 C13.1 | 135.89,295.91 C15.1 | 135.89,306.07 C3.1 | 135.89,311.15 C2.1 | C17.1 60.96,328.93 | 135.89,300.99 v132.08,300.99 | C6.1 60.96,295.91 | 60.96,335.28 C16.1
  other vias: 71.12,387.35 73.66,389.89 76.2,387.35 73.66,384.81 71.12,392.43 76.2,392.43 81.28,392.43 78.74,389.89 81.28,387.35 78.74,384.81 76.2,382.27 71.12,382.27 73.66,379.73 78.74,379.73 81.28,382.27 83.82,384.81 83.82,389.89 86.36,392.43 86.36,387.35 86.36,382.27 83.82,379.73 68.58,389.89 68.58,384.81 68.58,379.73 68.58,374.65 71.12,377.19 73.66,374.65 76.2,377.19 78.74,374.65 81.28,377.19 83.82,374.65 88.9,389.89 88.9,384.81 88.9,379.73 88.9,374.65 86.36,377.19 91.44,377.19 91.44,382.27 91.44,387.35 93.98,389.89 93.98,384.81 91.44,392.43 96.52,392.43 96.52,387.35 96.52,382.27 93.98,379.73 96.52,377.19 93.98,374.65 99.06,379.73 99.06,384.81 99.06,389.89 101.6,392.43 104.14,384.81 106.68,387.35 109.22,384.81 106.68,382.27 104.14,389.89 109.22,389.89 114.3,389.89 111.76,387.35 114.3,384.81 111.76,382.27 109.22,379.73 104.14,379.73 106.68,377.19 111.76,377.19 114.3,379.73 116.84,382.27 116.84,387.35 119.38,389.89 119.38,384.81 119.38,379.73 116.84,377.19 101.6,387.35 101.6,382.27 101.6,377.19 101.6,372.11 104.14,374.65 106.68,372.11 109.22,374.65 110.49,368.3 114.3,374.65 116.84,372.11 121.92,387.35 121.92,382.27 121.92,377.19 121.92,372.11 119.38,374.65 124.46,374.65 124.46,379.73 124.46,384.81 127,387.35 127,382.27 124.46,389.89 129.54,384.81 129.54,379.73 127,377.19 129.54,374.65 127,372.11 132.08,377.19 132.08,382.27 104.14,394.97 109.22,394.97 106.68,392.43 111.76,392.43 114.3,394.97 116.84,392.43 121.92,392.43 119.38,394.97 68.58,394.97 73.66,394.97 78.74,394.97 83.82,394.97 88.9,394.97 93.98,394.97 99.06,394.97 58.42,392.43 58.42,387.35 55.88,389.89 53.34,387.35 53.34,392.43 49.53,389.89 45.72,392.43 45.72,387.35 45.72,382.27 49.53,384.81 53.34,382.27 55.88,384.81 58.42,382.27 55.88,379.73 53.34,377.19 58.42,377.19 49.53,379.73 45.72,377.19 41.91,389.89 41.91,384.81 41.91,379.73 41.91,394.97 49.53,394.97 55.88,394.97 38.1,382.27 35.56,384.81 38.1,387.35 35.56,389.89 38.1,392.43 38.1,377.19 35.56,394.97 38.1,397.51 35.56,401.32 38.1,403.86 19.05,415.29 20.32,419.1 21.59,415.29 22.86,419.1 24.13,415.29 25.4,419.1 26.67,415.29 27.94,419.1 29.21,415.29 30.48,419.1 33.02,417.83 35.56,415.29 38.1,412.75 7.62,419.1 11.43,416.56 12.7,412.75 11.43,408.94 12.7,405.13 27.94,431.8 24.13,431.8 22.86,427.99 27.94,427.99 20.32,431.8 20.32,427.99 16.51,431.8 12.7,427.99 12.7,431.8 8.89,431.8 5.08,431.8 5.08,427.99 5.08,424.18 21.59,426.72 19.05,426.72 19.05,429.26 21.59,429.26 16.51,426.72 16.51,429.26 17.78,427.99 13.97,429.26 13.97,426.72 15.24,427.99 11.43,429.26 11.43,426.72 10.16,427.99 8.89,429.26 8.89,426.72 7.62,425.45 24.13,426.72 24.13,429.26 43.18,427.99 41.91,426.72 41.91,429.26 50.8,427.99 48.26,427.99 49.53,426.72 49.53,429.26 44.45,426.72 44.45,429.26 45.72,427.99 52.07,426.72 52.07,429.26 39.37,426.72 38.1,427.99 38.1,431.8 41.91,431.8 45.72,431.8 55.88,431.8 52.07,431.8 48.26,431.8 54.61,426.72 55.88,427.99 71.12,427.99 69.85,426.72 69.85,429.26 78.74,427.99 76.2,427.99 77.47,426.72 77.47,429.26 72.39,426.72 72.39,429.26 73.66,427.99 80.01,426.72 80.01,429.26 67.31,426.72 66.04,427.99 66.04,431.8 69.85,431.8 73.66,431.8 83.82,431.8 80.01,431.8 76.2,431.8 82.55,426.72 83.82,427.99 99.06,427.99 97.79,426.72 97.79,429.26 106.68,427.99 104.14,427.99 105.41,426.72 105.41,429.26 100.33,426.72 100.33,429.26 101.6,427.99 107.95,426.72 107.95,429.26 95.25,426.72 93.98,427.99 93.98,431.8 97.79,431.8 101.6,431.8 111.76,431.8 107.95,431.8 104.14,431.8 110.49,426.72 111.76,427.99 127,427.99 125.73,426.72 125.73,429.26 134.62,427.99 132.08,427.99 133.35,426.72 133.35,429.26 128.27,426.72 128.27,429.26 129.54,427.99 135.89,426.72 135.89,429.26 123.19,426.72 121.92,427.99 121.92,431.8 125.73,431.8 129.54,431.8 139.7,431.8 135.89,431.8 132.08,431.8 138.43,426.72 139.7,427.99 52.07,420.37 46.99,421.64 53.34,417.83 52.07,415.29 74.93,421.64 41.91,420.37 41.91,417.83 44.45,415.29 46.99,412.75 49.53,410.21 52.07,407.67 38.1,417.83 41.91,412.75 80.01,420.37 81.28,417.83 80.01,415.29 69.85,420.37 68.58,417.83 69.85,415.29 71.12,411.48 73.66,408.94 76.2,406.4 54.61,405.13 59.69,405.13 57.15,407.67 62.23,407.67 67.31,407.67 64.77,405.13 62.23,402.59 57.15,402.59 52.07,402.59 49.53,405.13 46.99,407.67 44.45,410.21 67.31,402.59 69.85,407.67 64.77,417.83 66.04,415.29 66.04,421.64 77.47,417.83 83.82,415.29 86.36,417.83 87.63,415.29 90.17,417.83 92.71,415.29 95.25,420.37 102.87,421.64 107.95,420.37 95.25,417.83 97.79,415.29 101.6,415.29 102.87,417.83 105.41,415.29 107.95,417.83 110.49,415.29 113.03,417.83 115.57,415.29 118.11,417.83 120.65,415.29 123.19,417.83 125.73,415.29 129.54,415.29 133.35,415.29 132.08,419.1 135.89,420.37 137.16,416.56 137.16,411.48 139.7,414.02 139.7,419.1 20.32,412.75 22.86,412.75 25.4,412.75 27.94,412.75 31.75,414.02 34.29,411.48 11.43,401.32 12.7,396.24 11.43,391.16 12.7,386.08 12.7,382.27 20.32,375.92 22.86,373.38 25.4,370.84 27.94,368.3 22.86,378.46 25.4,375.92 27.94,373.38 30.48,370.84 30.48,375.92 35.56,375.92 35.56,381 33.02,378.46 33.02,373.38 27.94,378.46 27.94,383.54 27.94,388.62 25.4,386.08 20.32,381 17.78,378.46 30.48,381 30.48,386.08 30.48,391.16 33.02,383.54 33.02,388.62 33.02,392.43 20.32,365.76 17.78,368.3 15.24,370.84 12.7,373.38 10.16,370.84 7.62,368.3 5.08,365.76 7.62,361.95 5.08,359.41 7.62,356.87 10.16,365.76 12.7,363.22 15.24,360.68 17.78,363.22 15.24,365.76 12.7,368.3 10.16,359.41 12.7,356.87 15.24,354.33 10.16,354.33 2.54,361.95 2.54,356.87 12.7,351.79 15.24,349.25 10.16,349.25 73.66,403.86 78.74,403.86 83.82,403.86 86.36,406.4 88.9,402.59 91.44,402.59 97.79,405.13 12.7,346.71 10.16,344.17 15.24,344.17 12.7,341.63 7.62,341.63 7.62,336.55 10.16,339.09 7.62,346.71 5.08,349.25 2.54,351.79 2.54,346.71 5.08,344.17 2.54,341.63 5.08,339.09 2.54,336.55 10.16,330.2 12.7,328.93 10.16,332.74 10.16,325.12 12.7,322.58 10.16,318.77 12.7,314.96 10.16,311.15 12.7,307.34 10.16,303.53 12.7,299.72 10.16,295.91 12.7,292.1 10.16,288.29 12.7,284.48 10.16,280.67 12.7,276.86 10.16,273.05 12.7,269.24 10.16,265.43 7.62,322.58 15.24,325.12 15.24,318.77 15.24,311.15 15.24,303.53 15.24,295.91 7.62,314.96 7.62,307.34 7.62,292.1 15.24,288.29 15.24,280.67 7.62,284.48 7.62,276.86 15.24,273.05 22.86,363.22 20.32,360.68 19.05,358.14 17.78,351.79 17.78,346.71 10.16,256.54 7.62,261.62 7.62,251.46 10.16,246.38 12.7,251.46 12.7,241.3 7.62,241.3 10.16,236.22 12.7,231.14 10.16,226.06 7.62,231.14 12.7,220.98 10.16,215.9 12.7,210.82 7.62,210.82 10.16,205.74 12.7,200.66 7.62,200.66 10.16,196.85 12.7,193.04 7.62,193.04 10.16,189.23 7.62,184.15 12.7,173.99 7.62,173.99 10.16,168.91 7.62,161.29 12.7,161.29 10.16,156.21 12.7,151.13 7.62,151.13 10.16,146.05 12.7,140.97 7.62,140.97 10.16,135.89 12.7,130.81 7.62,130.81 10.16,80.01 7.62,72.39 12.7,72.39 10.16,67.31 12.7,62.23 7.62,62.23 10.16,57.15 12.7,52.07 7.62,52.07 10.16,46.99 12.7,41.91 7.62,41.91 10.16,124.46 7.62,116.84 12.7,116.84 10.16,111.76 12.7,106.68 7.62,106.68 10.16,101.6 7.62,96.52 10.16,91.44 12.7,86.36 7.62,86.36 10.16,36.83 7.62,35.56 12.7,33.02 16.51,29.21 17.78,33.02 12.7,27.94 22.86,27.94 13.97,38.1 107.95,337.82 110.49,340.36 113.03,337.82 110.49,335.28 107.95,342.9 113.03,342.9 118.11,342.9 115.57,340.36 118.11,337.82 115.57,335.28 113.03,332.74 107.95,332.74 110.49,330.2 115.57,330.2 118.11,332.74 120.65,335.28 120.65,340.36 120.65,330.2 107.95,327.66 113.03,327.66 118.11,327.66 110.49,345.44 115.57,345.44 120.65,345.44 93.98,264.16 96.52,261.62 93.98,259.08 99.06,264.16 99.06,259.08 96.52,256.54 93.98,254 99.06,254 96.52,251.46 93.98,320.04 96.52,317.5 93.98,314.96 96.52,322.58 99.06,320.04 99.06,314.96 96.52,312.42 93.98,309.88 99.06,309.88 96.52,307.34 93.98,325.12 99.06,325.12 93.98,340.36 96.52,337.82 93.98,335.28 96.52,342.9 99.06,340.36 99.06,335.28 96.52,332.74 93.98,330.2 99.06,330.2 96.52,327.66 93.98,345.44 99.06,345.44 107.95,297.18 110.49,299.72 113.03,297.18 110.49,294.64 107.95,302.26 113.03,302.26 118.11,302.26 115.57,299.72 118.11,297.18 115.57,294.64 113.03,292.1 107.95,292.1 110.49,289.56 115.57,289.56 118.11,292.1 120.65,294.64 120.65,299.72 120.65,289.56 107.95,287.02 113.03,287.02 118.11,287.02 110.49,304.8 115.57,304.8 120.65,304.8 107.95,317.5 110.49,320.04 113.03,317.5 110.49,314.96 107.95,322.58 113.03,322.58 118.11,322.58 115.57,320.04 118.11,317.5 115.57,314.96 113.03,312.42 107.95,312.42 110.49,309.88 115.57,309.88 118.11,312.42 120.65,314.96 120.65,320.04 120.65,309.88 107.95,307.34 113.03,307.34 118.11,307.34 110.49,325.12 115.57,325.12 120.65,325.12 93.98,299.72 96.52,297.18 93.98,294.64 96.52,302.26 99.06,299.72 99.06,294.64 96.52,292.1 93.98,289.56 99.06,289.56 96.52,287.02 93.98,304.8 99.06,304.8 93.98,279.4 96.52,276.86 93.98,274.32 96.52,281.94 99.06,279.4 99.06,274.32 96.52,271.78 93.98,269.24 99.06,269.24 96.52,266.7 93.98,284.48 99.06,284.48 107.95,276.86 110.49,279.4 113.03,276.86 110.49,274.32 107.95,281.94 113.03,281.94 118.11,281.94 115.57,279.4 118.11,276.86 115.57,274.32 113.03,271.78 107.95,271.78 110.49,269.24 115.57,269.24 118.11,271.78 120.65,274.32 120.65,279.4 120.65,269.24 107.95,266.7 113.03,266.7 118.11,266.7 110.49,284.48 115.57,284.48 120.65,284.48 107.95,261.62 110.49,264.16 113.03,261.62 110.49,259.08 115.57,264.16 118.11,261.62 115.57,259.08 113.03,256.54 107.95,256.54 110.49,254 115.57,254 118.11,256.54 120.65,259.08 120.65,264.16 121.92,254 107.95,251.46 113.03,251.46 118.11,251.46 106.68,237.49 106.68,232.41 106.68,227.33 109.22,234.95 111.76,237.49 114.3,234.95 111.76,232.41 116.84,237.49 119.38,234.95 116.84,232.41 114.3,229.87 109.22,229.87 111.76,227.33 116.84,227.33 119.38,229.87 121.92,232.41 121.92,237.49 121.92,227.33 109.22,224.79 114.3,224.79 119.38,224.79 109.22,219.71 111.76,222.25 114.3,219.71 111.76,217.17 116.84,222.25 119.38,219.71 116.84,217.17 114.3,214.63 109.22,214.63 111.76,212.09 116.84,212.09 119.38,214.63 121.92,217.17 121.92,222.25 121.92,212.09 109.22,209.55 114.3,209.55 119.38,209.55 106.68,222.25 106.68,217.17 106.68,212.09 109.22,204.47 111.76,207.01 114.3,204.47 111.76,201.93 116.84,207.01 119.38,204.47 116.84,201.93 114.3,199.39 109.22,199.39 111.76,196.85 116.84,196.85 119.38,199.39 121.92,201.93 121.92,207.01 121.92,196.85 109.22,194.31 114.3,194.31 119.38,194.31 106.68,207.01 106.68,201.93 106.68,196.85 106.68,191.77 106.68,186.69 106.68,181.61 109.22,189.23 111.76,191.77 114.3,189.23 111.76,186.69 116.84,191.77 119.38,189.23 116.84,186.69 114.3,184.15 109.22,184.15 111.76,181.61 116.84,181.61 119.38,184.15 121.92,186.69 121.92,191.77 121.92,181.61 109.22,179.07 114.3,179.07 119.38,179.07 109.22,173.99 111.76,176.53 114.3,173.99 111.76,171.45 116.84,176.53 119.38,173.99 116.84,171.45 114.3,168.91 109.22,168.91 111.76,166.37 116.84,166.37 119.38,168.91 121.92,171.45 121.92,176.53 121.92,166.37 109.22,163.83 114.3,163.83 119.38,163.83 106.68,176.53 106.68,171.45 106.68,166.37 109.22,158.75 111.76,161.29 114.3,158.75 111.76,156.21 116.84,161.29 119.38,158.75 116.84,156.21 114.3,153.67 109.22,153.67 111.76,151.13 116.84,151.13 119.38,153.67 121.92,156.21 121.92,161.29 121.92,151.13 114.3,148.59 119.38,148.59 106.68,161.29 106.68,156.21 106.68,151.13 107.95,364.49 105.41,368.3 105.41,360.68 110.49,360.68 113.03,364.49 116.84,368.3 119.38,369.57 119.38,364.49 116.84,361.95 119.38,359.41 127,359.41 124.46,361.95 129.54,361.95 127,364.49 129.54,367.03 124.46,367.03 127,369.57 124.46,369.57 129.54,370.84 35.56,369.57 39.37,365.76 43.18,361.95 43.18,367.03 39.37,370.84 34.29,364.49 39.37,360.68 48.26,367.03 43.18,372.11 71.12,372.11 76.2,372.11 81.28,372.11 86.36,372.11 91.44,372.11 88.9,369.57 91.44,367.03 83.82,365.76 78.74,367.03 73.66,365.76 68.58,367.03 134.62,374.65 135.89,378.46 137.16,372.11 138.43,375.92 139.7,369.57 140.97,373.38 140.97,367.03 140.97,363.22 140.97,359.41 140.97,355.6 140.97,351.79 138.43,347.98 135.89,351.79 133.35,350.52 133.35,345.44 142.24,346.71 138.43,361.95 138.43,365.76 134.62,369.57 132.08,372.11 93.98,156.21 96.52,153.67 93.98,151.13 99.06,156.21 99.06,151.13 96.52,148.59 93.98,146.05 99.06,146.05 96.52,143.51 93.98,212.09 96.52,209.55 93.98,207.01 96.52,214.63 99.06,212.09 99.06,207.01 96.52,204.47 93.98,201.93 99.06,201.93 96.52,199.39 93.98,217.17 99.06,217.17 93.98,232.41 96.52,229.87 93.98,227.33 96.52,234.95 99.06,232.41 99.06,227.33 96.52,224.79 93.98,222.25 99.06,222.25 96.52,219.71 93.98,237.49 99.06,237.49 93.98,191.77 96.52,189.23 93.98,186.69 96.52,194.31 99.06,191.77 99.06,186.69 96.52,184.15 93.98,181.61 99.06,181.61 96.52,179.07 93.98,196.85 99.06,196.85 93.98,171.45 96.52,168.91 93.98,166.37 96.52,173.99 99.06,171.45 99.06,166.37 96.52,163.83 93.98,161.29 99.06,161.29 96.52,158.75 93.98,176.53 99.06,176.53 68.58,254 66.04,312.42 68.58,309.88 66.04,307.34 68.58,314.96 71.12,312.42 71.12,307.34 68.58,304.8 66.04,302.26 71.12,302.26 68.58,299.72 66.04,317.5 71.12,317.5 66.04,332.74 68.58,330.2 66.04,327.66 68.58,335.28 71.12,332.74 71.12,327.66 68.58,325.12 66.04,322.58 71.12,322.58 68.58,320.04 66.04,337.82 71.12,337.82 66.04,292.1 68.58,289.56 66.04,287.02 68.58,294.64 71.12,292.1 71.12,287.02 68.58,284.48 66.04,281.94 71.12,281.94 68.58,279.4 66.04,297.18 71.12,297.18 66.04,271.78 68.58,269.24 68.58,274.32 71.12,271.78 66.04,261.62 71.12,261.62 68.58,259.08 66.04,276.86 71.12,276.86 66.04,210.82 68.58,208.28 66.04,205.74 68.58,213.36 71.12,210.82 71.12,205.74 68.58,203.2 66.04,200.66 71.12,200.66 68.58,198.12 66.04,215.9 71.12,215.9 66.04,231.14 68.58,228.6 66.04,226.06 68.58,233.68 71.12,231.14 71.12,226.06 68.58,223.52 66.04,220.98 71.12,220.98 68.58,218.44 66.04,236.22 71.12,236.22 66.04,190.5 68.58,187.96 66.04,185.42 68.58,193.04 71.12,190.5 71.12,185.42 68.58,182.88 66.04,180.34 71.12,180.34 68.58,177.8 66.04,195.58 71.12,195.58 66.04,170.18 68.58,167.64 68.58,172.72 66.04,175.26 71.12,175.26 68.58,340.36 71.12,165.1 66.04,165.1 66.04,160.02 71.12,160.02 68.58,157.48 66.04,154.94 71.12,154.94 68.58,152.4 66.04,148.59 71.12,148.59 68.58,144.78 71.12,140.97 66.04,140.97 66.04,130.81 73.66,130.81 71.12,128.27 68.58,125.73 66.04,123.19 68.58,120.65 71.12,123.19 73.66,125.73 73.66,120.65 66.04,128.27 66.04,118.11 68.58,115.57 71.12,111.76 73.66,107.95 71.12,105.41 68.58,105.41 109.22,148.59 111.76,146.05 114.3,143.51 111.76,140.97 114.3,138.43 106.68,146.05 109.22,143.51 106.68,140.97 116.84,146.05 119.38,143.51 116.84,140.97 121.92,146.05 121.92,140.97 119.38,138.43 96.52,130.81 99.06,127 96.52,123.19 91.44,130.81 93.98,127 91.44,123.19 93.98,119.38 91.44,115.57 99.06,119.38 111.76,130.81 109.22,127 106.68,130.81 114.3,127 111.76,123.19 114.3,119.38 106.68,123.19 109.22,119.38 106.68,115.57 96.52,110.49 99.06,106.68 96.52,102.87 93.98,106.68 116.84,130.81 119.38,127 116.84,123.19 119.38,119.38 121.92,123.19 121.92,130.81 116.84,115.57 114.3,111.76 111.76,107.95 109.22,104.14 114.3,104.14 119.38,104.14 121.92,107.95
  pour Route15: 93.98,246.38 93.98,90.17 121.92,90.17 121.92,352.43 93.98,352.43
  pour Top (isolate 0.254): -5.08,441.73 -5.08,-5.08 149.86,-5.08 149.86,441.73
  pour Route15 (isolate 0.254): -3.81,440.69 148.59,440.69 148.59,-3.81 -3.81,-3.81
  pour Bottom: -2.54,369.57 25.4,369.57 30.48,364.49 30.48,-2.54 -2.54,-2.54
I2C1_SCL
  Top 0.508: H1_OBC.44 119.38,256.54 120.65,255.27 120.65,241.3 | 120.65,241.3 JP7.2 R_I2C1_SCL.1 | 120.65,241.3 120.02,240.66 H1_PWR.44
I2C1_SDA
  Top 0.508: H1_OBC.42 116.84,249.99 118.05,248.78 118.05,241.3 | 118.05,241.3 118.05,134.56 | 118.05,134.56 118.05,110.23 R_I2C1_SDA.1 | 118.05,241.3 117.41,240.66 H1_PWR.42 | JP7.1 118.05,134.56
I2C2_SCL
  Route15 0.508: H1_OBC.37 110.49,352.43 110.49,356.87 111.76,358.14 111.76,374.65 105.41,381 TESTPIN2.4 38.1,381 16.51,359.41 16.51,337.82 13.97,335.28 13.97,271.78 15.24,270.51 20.32,270.51 22.86,267.97 ARDUINO_2.3 ARDUINO_3.3 ARDUINO_4.3
I2C2_SDA
  Route15 0.508: H1_OBC.35 107.95,352.43 107.95,356.87 106.68,358.14 106.68,369.57 100.33,375.92 TESTPIN2.2 38.1,375.92 27.94,365.76 27.94,256.54 | 27.94,256.54 ARDUINO_2.4 | 27.94,256.54 27.94,177.8 | 27.94,177.8 27.94,95.25 ARDUINO_4.4 | 27.94,177.8 ARDUINO_3.4
I2C3_SCL  (via drill 0.35)
  Top 0.508: v26.04,379.1 15.76,389.37 CIA.6
  Route15 0.508: H1_OBC.51 128.27,352.43 128.27,373.38 113.03,388.62 TESTPIN2.7 35.56,388.62 v26.04,379.1 11.43,364.49 11.43,342.9 8.89,340.36 8.89,34.29 22.86,20.32 ARDUINO_5.3
I2C3_SDA  (via drill 0.35)
  Top 0.508: v25.4,373.38 14.26,384.52 CIA.7
  Route15 0.508: H1_OBC.49 126.36,351.15 125.73,351.79 125.73,370.84 110.49,386.08 TESTPIN2.6 38.1,386.08 v25.4,373.38 13.97,361.95 13.97,340.36 11.43,337.82 11.43,36.83 25.4,22.86 ARDUINO_5.4
N$1
  Top 0.508: R_UART1_RX.2 72.39,104.14 69.79,101.54 69.79,94.11 68.58,92.91 H1_COMM.4
N$2
  Top 0.508: R13.2 13.97,21.59 12.7,20.32 LED4.A
N$3
  Top 0.508: R_UART1_TX.2 67.31,93.34 H1_COMM.2
N$4
  Top 0.508: R_PH5_POS.2 107.95,93.34 H1_COMM.36
N$5
  Top 0.508: R_PH5_NEG.2 113.03,93.34 H1_COMM.38
N$6
  Top 0.508: R_ANT_BURN_1.1 92.71,95.89 H1_COMM.23
N$7
  Top 0.508: R_ANT_BURN_2.1 97.79,95.89 H1_COMM.25
N$8
  Top 0.508: R_I2C1_SDA.2 118.11,93.34 H1_COMM.42
N$9
  Top 0.508: R_I2C1_SCL.2 120.65,93.34 H1_COMM.44
N$10
  Top 0.508: R12.2 13.97,99.06 12.7,97.79 LED3.A
N$13
  Top 0.508: R11.2 13.97,184.15 12.7,182.88 LED2.A
N$14
  Top 0.508: R10.2 13.97,262.89 12.7,261.62 LED1.A
N$15
  Top 0.508: R9.2 16.73,341.63 12.7,337.6 LED6.A
N$16
  Top 0.61: R14.2 20.32,62.23 19.05,60.96 19.05,49.53 20.32,48.26 22.86,48.26
  Top 1.016: 22.86,48.26 TESTBENCH_1.P$1
PCM_IN
  Route15 0.508: H2_OBC.36 H2_OBC.35 109.22,372.11 102.87,378.46 TESTPIN2.3
PH5_NEG
  Top 0.508: H1_OBC.38 111.76,249.99 112.97,248.78 112.97,137.1 JP6.2 113.03,132.08 R_PH5_NEG.1
PH5_POS
  Top 0.508: H1_OBC.36 109.22,250.19 107.95,248.92 JP6.1 R_PH5_POS.1
SPI_EN_1
  Top 0.508: RWA_1.2 49.99,422.91 51.26,421.64 53.34,421.64 54.61,420.37 54.61,407.67 55.88,406.4 69.85,406.4 72.39,403.86 TESTPIN1.2 72.39,351.79 73.03,351.15 H1_OBC.7
SPI_EN_2
  Top 0.508: H1_OBC.8 73.66,347.98 74.93,346.71 76.2,346.71 77.47,347.98 TESTPIN1.4 77.47,407.67 82.55,412.75 82.55,420.37 81.28,421.64 79.2,421.64 77.93,422.91 RWA_2.2
SPI_EN_3  (via drill 0.45)
  Top 0.508: RWA_3.2 105.87,422.91 107.14,421.64 107.95,421.64 109.22,420.37 109.22,412.75 107.95,411.48 97.79,411.48 90.17,403.86 TESTPIN1.9 v90.17,359.41
  Route15 0.508: H1_OBC.22 90.17,349.88 v90.17,359.41
SPI_EN_4
  Top 0.508: RWA_4.2 133.81,422.91 134.85,421.87 136.93,421.87 138.43,420.37 138.43,407.67 134.62,403.86 97.79,403.86 95.25,401.32 TESTPIN1.11 95.25,353.22 94.49,352.46 93.38,352.46 92.71,351.79 92.08,351.79 H1_OBC.21
SPI_MISO
  Top 0.508: 74.93,433.07 48.26,433.07 46.99,431.8 RWA_1.4 | 74.93,433.07 88.9,433.07 | 88.9,433.07 102.87,433.07 | 102.87,433.07 130.81,433.07 RWA_4.4 | 74.93,433.07 RWA_2.4 | 102.87,433.07 RWA_3.4 | 88.9,433.07 88.9,411.48 85.09,407.67 TESTPIN1.7 85.09,349.25 85.72,348.62 H1_OBC.18
SPI_MOSI  (via drill 0.45)
  Top 0.508: TESTPIN1.6 82.55,349.25 83.19,348.62 H1_OBC.16 | v134.62,414.02 134.62,419.1 132.31,421.41 RWA_4.3 | RWA_1.3 48.49,421.41 50.8,419.1 v50.8,414.02 | v106.68,414.02 106.68,419.1 104.37,421.41 RWA_3.3 | RWA_2.3 76.43,421.41 78.74,419.1 v78.74,414.02
  Route15 0.508: 77.47,414.02 v78.74,414.02 v106.68,414.02 v134.62,414.02 | 77.47,414.02 v50.8,414.02 | TESTPIN1.6 82.55,407.67 77.47,412.75 77.47,414.02
SPI_SCK  (via drill 0.45)
  Top 0.508: H1_OBC.12 80.01,349.88 TESTPIN1.5 80.01,406.4 85.09,411.48 v85.09,419.1 | RWA_3.5 101.37,421.41 v99.06,419.1 | v127,419.1 129.31,421.41 RWA_4.5 | RWA_1.5 45.49,421.41 v43.18,419.1 | RWA_2.5 73.43,421.41 v71.12,419.1
  Route15 0.508: v43.18,419.1 v71.12,419.1 v85.09,419.1 v99.06,419.1 v127,419.1
SPI_SS_1  (via drill 0.45)
  Top 0.508: RWA_1.6 43.99,422.91 42.72,421.64 41.91,421.64 40.64,420.37 40.64,416.56 53.34,403.86 68.58,403.86 69.85,402.59 TESTPIN1.1 v69.85,359.41
  Route15 0.508: H1_OBC.9 74.97,352.39 70.52,352.39 69.85,353.06 v69.85,359.41
SPI_SS_2
  Top 0.508: RWA_2.6 71.93,422.91 70.66,421.64 68.58,421.64 67.31,420.37 67.31,412.75 74.93,405.13 TESTPIN1.3 74.93,349.25 75.56,348.62 H1_OBC.10
SPI_SS_3
  Top 0.508: RWA_3.6 99.87,422.91 98.6,421.64 93.98,421.64 91.44,419.1 91.44,410.21 87.63,406.4 TESTPIN1.8 87.63,349.25 88.27,348.62 H1_OBC.20
SPI_SS_4
  Top 0.508: RWA_4.6 127.81,422.91 126.77,421.87 120.88,421.87 119.38,420.37 119.38,407.67 118.11,406.4 96.52,406.4 92.71,402.59 TESTPIN1.10 92.71,353.22 91.95,352.46 90.21,352.46 H1_OBC.19
UART1_RX  (via drill 0.35)
  Top 0.508: v69.85,170.18 TESTPIN3.2 72.39,132.08 R_UART1_RX.1
  Route15 0.508: H1_OBC.4 68.58,342.9 69.85,341.63 v69.85,170.18
UART1_TX  (via drill 0.35)
  Top 0.508: R_UART1_TX.1 TESTPIN3.1 v67.31,163.83
  Route15 0.508: H1_OBC.2 66.04,340.36 67.31,339.09 v67.31,163.83
UART3_RX  (via drill 0.35)
  Top 0.508: v6.35,328.93 7.62,327.66 20.32,327.66 25.4,332.74 ARDUINO_1.4
  Route15 0.508: H1_OBC.52 136.25,348.62 139.59,351.95 139.59,367.14 115.57,391.16 TESTPIN2.8 33.02,391.16 8.89,367.03 8.89,345.44 6.35,342.9 v6.35,328.93
UART3_TX  (via drill 0.35)
  Top 0.508: v3.81,334.01 6.35,331.47 21.59,331.47 22.86,332.74 ARDUINO_1.3
  Route15 0.508: H1_OBC.50 128.91,346.71 139.7,346.71 142.24,349.25 142.24,369.57 118.11,393.7 TESTPIN2.9 30.48,393.7 3.81,367.03 v3.81,334.01
UART4_RX
  Top 0.508: H1_OBC.3 67.27,349.85 65.53,349.85 64.93,349.25 58.42,349.25 36.83,370.84 JP2.2 36.83,411.48 31.75,416.56 20.32,416.56 18.76,418.12 CIA.4
UART4_TX
  Top 0.508: H1_OBC.1 65.22,351.98 60.99,351.98 39.37,373.6 JP2.3 39.37,414.02 33.02,420.37 21.59,420.37 20.26,421.7 CIA.3

## Text on the board
tNames: DTR | UART4_RX | UART4_TX | GND | SPI_SS_1 | SPI_EN_1 | SPI_SS_2 | SPI_EN_2 | SPI_SCK | SPI_MOSI | SPI_MISO | SPI_SS_3 | SPI_EN_3 | SPI_SS_4 | SPI_EN_ | GND | GND | UART3_TX | UART3_RX | I2C3_SCL | I2C3_SDA | BCR_OUT | Arduino 1 | I2C2_SCL | PCM_IN | I2C2_SDA | 12V_BUS | GND | OBC | PDM6_Stabilizer | 1 | GND | ARD_PWR | UART3_TX | UART3_RX | PDM4_Stabilizer | PDM1_Stabilizer | Arduino 2 | PDM2_Stabilizer | PDM3_Stabilizer | PDM5_Stabilizer | EPS | 2 | GND | ARD_PWR | I2C2_SCL | I2C2_SDA | Arduino 3 | FLATSAT TEST / MODULE | Collin Pernu, UW AACT / REV 1, 2-21-2021 | 3 | GND | ARD_PWR | I2C2_SCL | I2C2_SDA | PWR_NEG | ARD_PWR_POS | Arduino 4 | UART1_TX | UART1_RX | ANT_BURN_1 | ANT_BURN_2 | PH5_POS | PH5_NEG | I2C1_SDA | I2C1_SCL | GND | COM_R | 4 | GND | ARD_PWR | I2C2_SCL | I2C2_SDA | Ground To Bench | Arduino 5 | 5 | GND | ARD_PWR | I2C3_SCL | I2C3_SDA